# Altium PCB 抢答器.PcbDoc
Units mm, origin at the board's own origin, x right, y up, seen from the top; angles counter-clockwise.
Board outline 95.2 x 95.2 mm, 2 copper layers (Top Layer, Bottom Layer); 75 components, 1 nets, 234 pads, 14 vias.
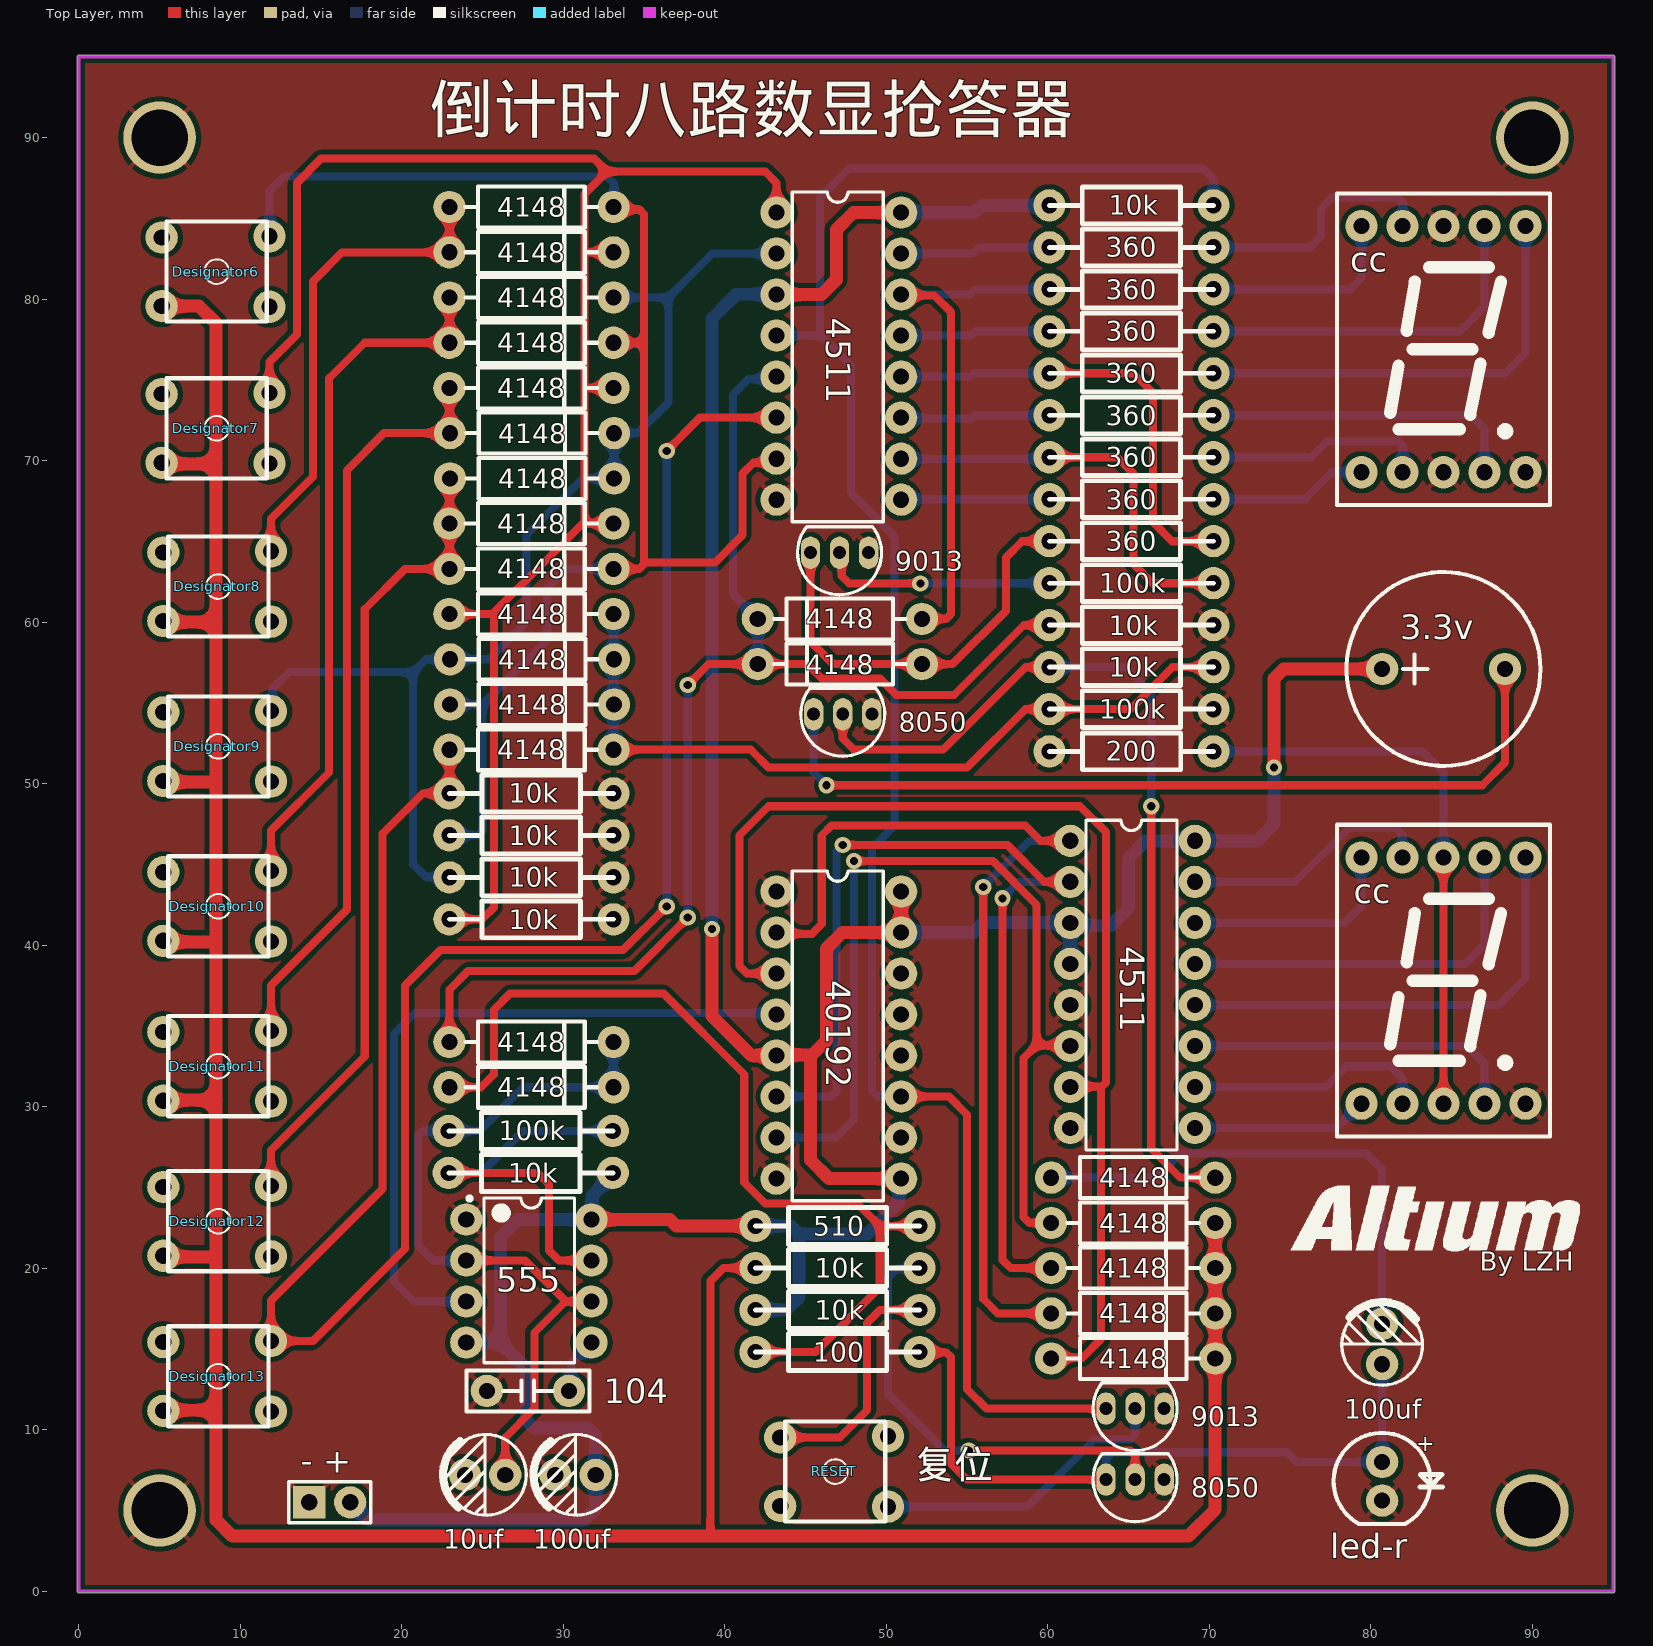
[diagram p0: Top Layer view]
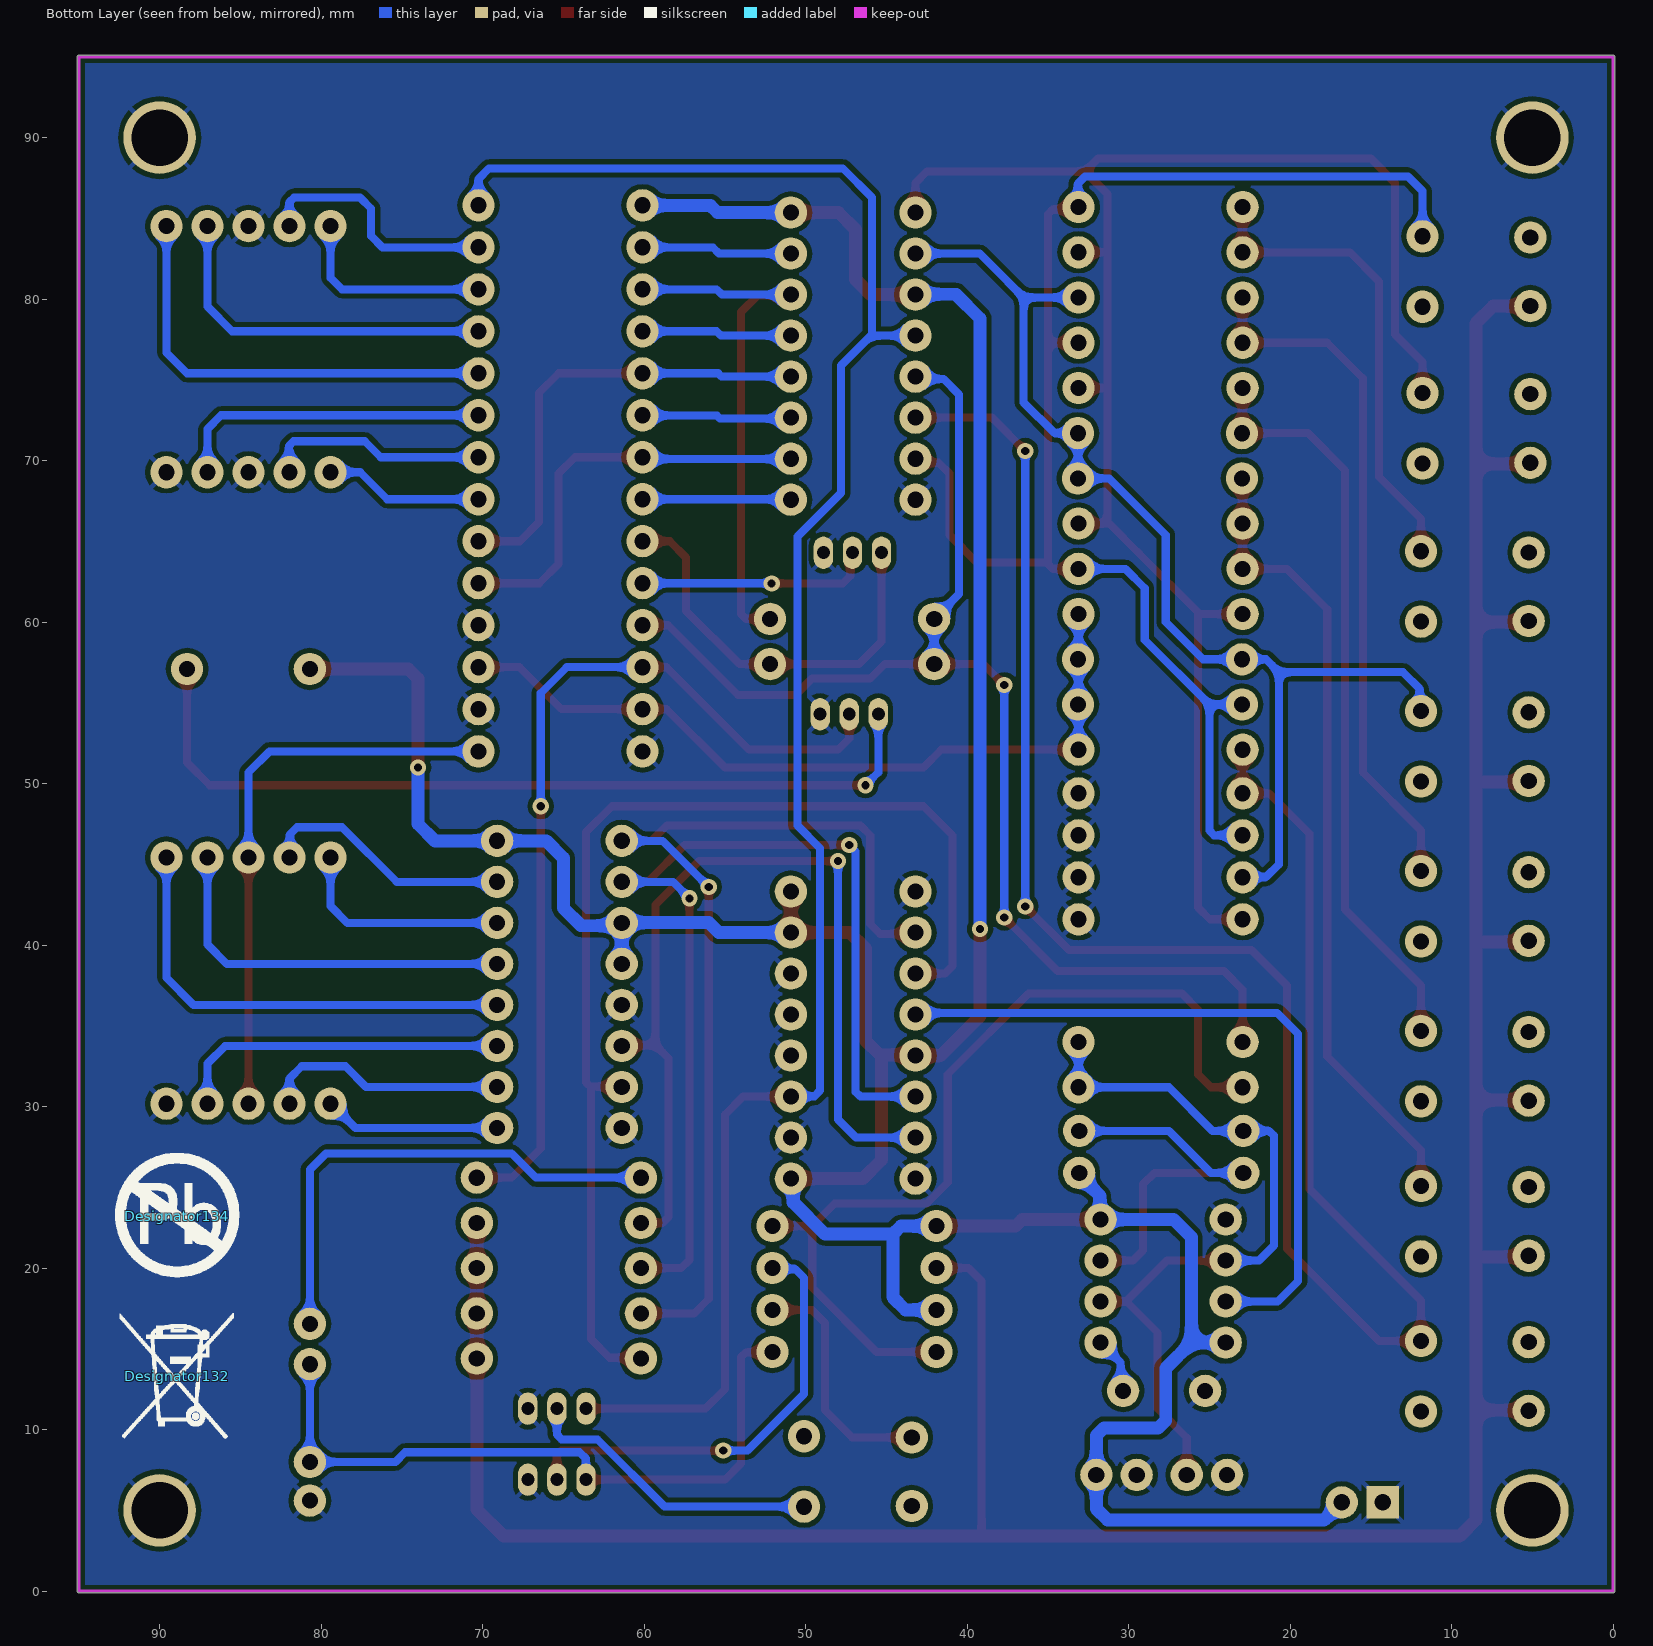
[diagram p1: Bottom Layer view, seen from below]
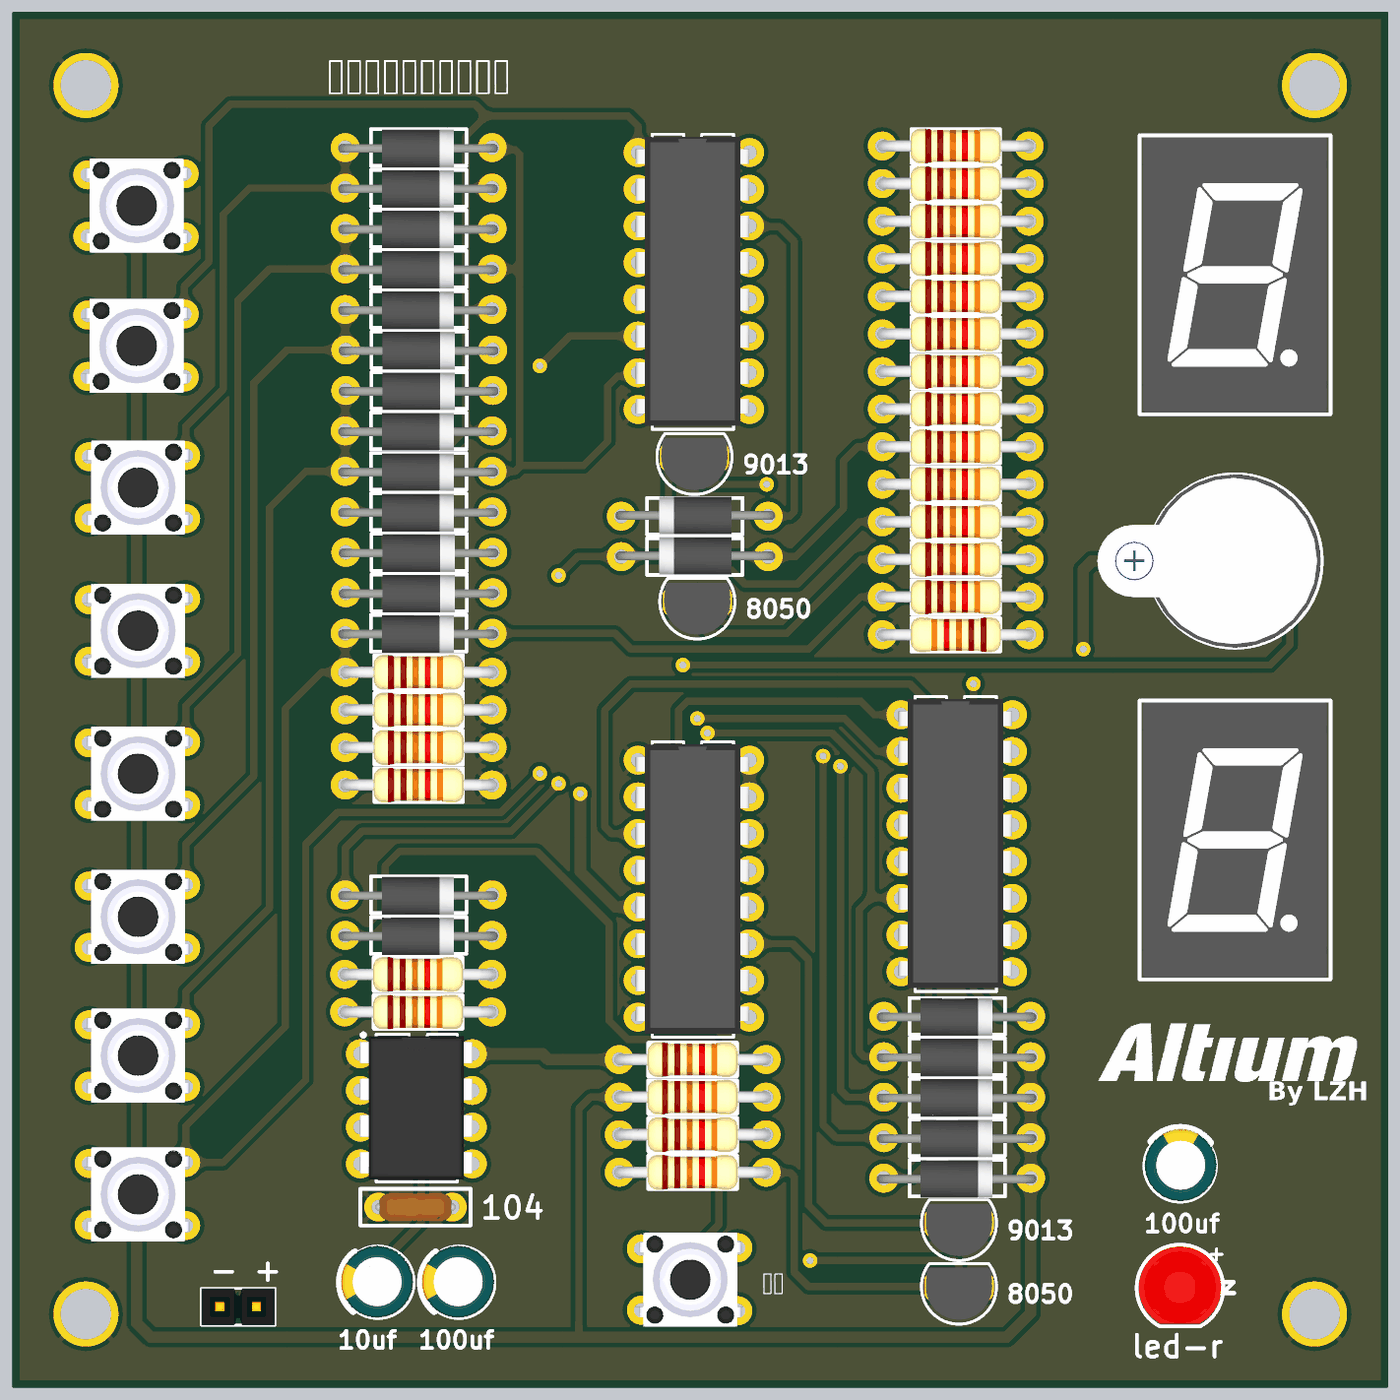
[diagram p2: 3D render of the assembled board from above, using the file's embedded part models]

## Layer stack, top to bottom
Top Solder: solder mask 0.0102, Solder Resist, Dk 3.5
Top Layer: signal copper 0.0356
Dielectric 1: dielectric 0.32, FR-4, Dk 4.8
Bottom Layer: signal copper 0.0356
Bottom Solder: solder mask 0.0102, Solder Resist, Dk 3.5

## Board outline
-0.1,0 ccw(c0,0) 0,-0.1 95,-0.1 ccw(c95,0) 95.1,0 95.1,95 ccw(c95,95) 95,95.1 0,95.1 ccw(c0,95) -0.1,95

## Design rules (kind name [scope] priority, off if disabled: settings)
Clearance Clearance_2 [OnLayer('Bottom Layer')] p1: gap=0.3 ignorepadtopadclearanceinfootprint=TRUE
Clearance Clearance_1 [OnLayer('Top Layer')] p2: gap=0.3 ignorepadtopadclearanceinfootprint=TRUE
ComponentClearance [All] p1: gap=0 collisioncheckmode=3 verticalgap=0 showdistances=FALSE
Height [All] p1: minheight=0 maxheight=40 prefheight=12.7
HoleSize [All] p1: absolutevalues=TRUE maxlimit=3.5 minlimit=0.025 maxpercent=80.000 minpercent=20.000
PlaneClearance [All] p1: clearance=0.3
PlaneConnect [All] p1: planeconnectstyle=Relief reliefexpansion=0.3 reliefentries=4 reliefconductorwidth=0.3 reliefairgap=0.3
PolygonConnect [All] p1: connectstyle=Relief reliefconductorwidth=0.3 reliefentries=4 polygonreliefangle="45 Angle" airgapwidth=0.3
RoutingVias [All] p1: holewidth=1 width=2 viastyle="Through Hole" minholewidth=0.5 minwidth=1 maxholewidth=0.6 maxwidth=8
SolderMaskExpansion [All] p1: expansion=0 istentingtop=FALSE
UnRoutedNet [All] p1: checkbadconnections=TRUE
Width [All] p1: maxlimit=0.8 minlimit=0.3 preferedwidth=0.5 minimp=50.000000 maximp=50.000000 favimp=50.000000
24 further rules are at their usual default settings.

## Components (designator, comment, footprint, x,y, rotation, side; value= is the part's Value field where it differs from the comment)
3.3v "Comment" FMQ7.6mm 80.7,57.1 r0 top
10k "Comment" AXIAL0.4 22.9,25.9 r0 top
10k "Comment" AXIAL0.4 41.896,20.009 r0 top
10k "Comment" AXIAL0.4 41.896,17.409 r0 top
10k "Comment" AXIAL0.4 60.096,59.809 r0 top
10k "Comment" AXIAL0.4 60.096,57.209 r0 top
10k "Comment" AXIAL0.4 60.096,85.809 r0 top
10k "Comment" AXIAL0.4 22.94,41.6 r0 top
10k "Comment" AXIAL0.4 22.94,44.2 r0 top
10k "Comment" AXIAL0.4 22.94,46.8 r0 top
10k "Comment" AXIAL0.4 22.94,49.4 r0 top
10uf "Comment" "CAP 2.5*5*11 - GD" 25.15,7.2 r180 top
100 "Comment" AXIAL0.4 41.896,14.809 r0 top
100k "Comment" AXIAL0.4 22.9,28.5 r0 top
100k "Comment" AXIAL0.4 60.096,54.609 r0 top
100k "Comment" AXIAL0.4 60.096,62.409 r0 top
100uf "Comment" "CAP 2.5*5*11 - GD" 80.7,15.3 r90 top
100uf "Comment" "CAP 2.5*5*11 - GD" 30.75,7.2 r180 top
104 "Comment" MLCC5.08-A 27.8,12.4 r0 top
200 "Comment" AXIAL0.4 70.26,52 r180 top
360 "Comment" AXIAL0.4 60.096,65.009 r0 top
360 "Comment" AXIAL0.4 60.096,75.409 r0 top
360 "Comment" AXIAL0.4 60.096,72.809 r0 top
360 "Comment" AXIAL0.4 60.096,70.209 r0 top
360 "Comment" AXIAL0.4 60.096,67.609 r0 top
360 "Comment" AXIAL0.4 60.096,83.209 r0 top
360 "Comment" AXIAL0.4 60.096,80.609 r0 top
360 "Comment" AXIAL0.4 60.096,78.009 r0 top
510 "Comment" AXIAL0.4 41.896,22.609 r0 top
555 "Comment" DIP8 28,19.2 r0 top
4148 "Comment" DIODE0.4 60.2,25.6 r0 top
4148 "Comment" DIODE0.4 60.2,14.4 r0 top
4148 "Comment" DIODE0.4 60.2,17.2 r0 top
4148 "Comment" DIODE0.4 60.2,20 r0 top
4148 "Comment" DIODE0.4 60.2,22.8 r0 top
4148 "Comment" DIODE0.4 22.94,34 r0 top
4148 "Comment" DIODE0.4 22.94,31.2 r0 top
4148 "Comment" DIODE0.4 52.2,57.4 r180 top
4148 "Comment" DIODE0.4 52.2,60.2 r180 top
4148 "Comment" DIODE0.4 22.94,85.7 r0 top
4148 "Comment" DIODE0.4 22.94,82.9 r0 top
4148 "Comment" DIODE0.4 22.94,52.1 r0 top
4148 "Comment" DIODE0.4 22.98,68.9 r0 top
4148 "Comment" DIODE0.4 22.98,71.7 r0 top
4148 "Comment" DIODE0.4 22.94,74.5 r0 top
4148 "Comment" DIODE0.4 22.94,77.3 r0 top
4148 "Comment" DIODE0.4 22.94,80.1 r0 top
4148 "Comment" DIODE0.4 22.94,66.1 r0 top
4148 "Comment" DIODE0.4 22.94,63.3 r0 top
4148 "Comment" DIODE0.4 22.94,60.5 r0 top
4148 "Comment" DIODE0.4 22.98,57.7 r0 top
4148 "Comment" DIODE0.4 22.98,54.9 r0 top
4511 "Comment" DIP16 59.667,46.46 r0 top
4511 "Comment" DIP16 41.481,85.36 r0 top
8050 "Comment" TO92A 47.3,54.3 r90 top
8050 "Comment" TO92A 65.4,6.9 r90 top
9013 "Comment" TO92A 65.4,11.3 r90 top
9013 "Comment" TO92A 47.1,64.3 r90 top
40192 "Comment" DIP16 41.481,43.32 r0 top
"- +" "Comment" HDR1X2 14.27,5.493 r0 top
"By LZH" "Comment" Altium_Logo 75.2,25.2 r0 top
cc "Comment" "SMG 0.5-1P" 84.5,76.9 r0 top
cc "Comment" "SMG 0.5-1P" 84.5,37.8 r0 top
Designator6 "Comment" KEY-DIP4 8.5,81.7 r0 top
Designator7 "Comment" KEY-DIP4 8.5,72 r0 top
Designator8 "Comment" KEY-DIP4 8.6,62.2 r0 top
Designator9 "Comment" KEY-DIP4 8.6,52.3 r0 top
Designator10 "Comment" KEY-DIP4 8.6,42.4 r0 top
Designator11 "Comment" KEY-DIP4 8.6,32.5 r0 top
Designator12 "Comment" KEY-DIP4 8.6,22.9 r0 top
Designator13 "Comment" KEY-DIP4 8.6,13.3 r0 top
Designator132 "Comment" ICO3 88.898,13.3 r180 bottom
Designator134 "Comment" ICO2 88.9,23.2 r180 bottom
led-r "Comment" LED5MM-RED 80.7,6.8 r180 top
RESET "Comment" KEY-DIP4 46.8,7.4 r0 top

## Footprints (in the part's own frame and the unit in brackets; to place one, negate y for a bottom-side part, rotate by r counter-clockwise, add the part's x,y. Pads: shape width x height; smd on the part's side, far side on the other; paste and mask are expansions set on the pad)
Altium_Logo [mm]
  silkscreen extent -0.15,-4.13 17.73,-0.11
AXIAL0.4 [mm] "此模型引用\"王千会\"作品，特此声明"
  round 2 hole 1: 1(0,0) 2(10.16,0)
  silkscreen extent 0,-1.14 10.16,1.14, body extent -0.32,-1.2 10.48,1.2, height 2.58
"CAP 2.5*5*11 - GD" [mm] "脚距2.5mm直径5mm高度11mm"
  round 2 hole 1: 1(-1.25,0) 2(1.25,0)
  silkscreen extent -2.55,-2.5 2.6,2.5, body extent -2.5,-2.54 2.51,2.46, height 11.04
DIODE0.4 [mm]
  round 2 hole 1: A(0,0) K(10.16,0)
  silkscreen extent 1.02,-1.27 9.14,1.27, body extent -0.5,-1.36 10.56,1.24, height 1.49
DIP8 [mm]
  round 2 hole 1: 1(-4.013,3.81) 2(-4.013,1.27) 3(-4.013,-1.27) 4(-4.013,-3.81) 5(3.734,-3.81) 6(3.734,-1.27) 7(3.734,1.27) 8(3.734,3.81)
  silkscreen extent -3.93,-5.05 2.69,5.23, body extent -4.06,-4.88 3.76,5.03, height 4.57
DIP16 [mm]
  round 2 hole 1: 1(1.719,0) 2(1.719,-2.54) 3(1.719,-5.08) 4(1.719,-7.62) 5(1.719,-10.16) 6(1.719,-12.7) 7(1.719,-15.24) 8(1.719,-17.78) 9(9.433,-17.78) 10(9.433,-15.24) 11(9.433,-12.7) 12(9.433,-10.16) 13(9.433,-7.62) 14(9.433,-5.08) 15(9.433,-2.54) 16(9.433,0)
  silkscreen extent 2.69,-19.15 8.33,1.27, body extent 1.55,-18.92 9.42,1.08, height 5.08
FMQ7.6mm [mm]
  round 2 hole 1: 1(0,0) 2(7.6,0)
  silkscreen extent -2.2,-6 9.8,6, body extent -5.73,-6 9.73,6, height 9.65
HDR1X2 [mm]
  rect 2x2 hole 1: 1(-0.01,0.007)
  round 2 hole 1: 2(2.53,0.007)
  silkscreen extent -1.28,-1.26 3.8,1.28, body extent -1.28,-1.26 3.8,1.28, height 8.41
ICO2 [mm]
  silkscreen extent -3.84,-3.76 3.84,3.89
ICO3 [mm]
  silkscreen extent -3.58,-3.86 3.48,3.86
KEY-DIP4 [mm] "6X6"
  round 2 hole 1: 1(-3.373,2.116) 1(3.299,2.189) 2(-3.373,-2.134) 2(3.299,-2.172)
  silkscreen extent -3.06,-3.09 3.13,3.1, body extent -4.12,-3.27 4.14,3.23, height 4.3
LED5MM-RED [mm]
  round 2 hole 1 mask+0.03: 1(0,-1.2) 2(0,1.2)
  silkscreen extent -3.73,-3 3.01,2.65, body extent -2.85,-2.89 2.85,2.46, height 8.6
MLCC5.08-A [mm] "独石电容，脚距5.08mm"
  round 2 hole 1: 1(-2.54,0) 2(2.54,0)
  silkscreen extent -3.81,-1.27 3.81,1.27, body extent -2.79,-1 2.79,1, height 3.71
"SMG 0.5-1P" [mm] "12.7*19*8mm(长宽厚)"
  round 2 hole 1: 1(-5.08,-7.62) 2(-2.54,-7.62) 3(0,-7.62) 4(2.54,-7.62) 5(5.08,-7.62) 6(5.08,7.62) 7(2.54,7.62) 8(0,7.62) 9(-2.54,7.62) 10(-5.08,7.62)
  silkscreen extent -6.6,-9.65 6.6,9.65, body extent -6.35,-9.5 6.35,9.5, height 8
TO92A [mm] "92晶体管"
  oval 2x1.2 hole 0.8: 1(0,-1.8) 2(0,0) 3(0,1.8)
  silkscreen extent -2.6,-2.6 1.6,2.6, body extent -2.3,-2.3 1.3,2.3, height 7.6

## Free pads (board coordinates)
  round 4.5 hole 3.5: 1(5,90) 2(90,90) 3(90,5) 4(5,5)

## Via types
v1: diameter 1, hole 0.5, Top Layer to Bottom Layer, 14 vias

## Nets (pads, with @x,y where several pads share a name; then routed paths per layer and width w, separated by ;. In a path a pad name is that pad's centre, name@x,y a point inside that pad or via, vN(x,y) a via of type N, cw(c..) or ccw(c..) an arc to the next point about the centre after c; other vN are vias at no path point)
GND: 10k.2@33.1,41.6 10k.2@33.1,44.2 10k.2@33.1,46.8 10k.2@33.1,49.4 10k.2@70.256,59.809 10uf.2 100k.2@70.256,54.609 100uf.2@29.5,7.2 104.1 200.2 555.1 4511.5@61.386,36.3 4511.8 8050.1 9013.1 40192.1 40192.8 40192.10 40192.12 40192.13 40192.14 "- +.1" cc.3@84.5,69.28 cc.5 cc.8@84.5,84.52 led-r.2 pad.1 pad.2 pad.3 pad.4
pads on no net: 3.3v.1 3.3v.2 10k.1 10k.2@33.06,25.9 10k.2@52.056,17.409 10k.2@52.056,20.009 10k.2@70.256,57.209 10k.2@70.256,85.809 10uf.1 100.1 100.2 100k.1 100k.2@33.06,28.5 100k.2@70.256,62.409 100uf.1 100uf.2@80.7,16.55 104.2 200.1 360.1 360.2 510.1 510.2 555.2 555.3 555.4 555.5 555.6 555.7 555.8 4148.A 4148.K 4511.1 4511.2 4511.3 4511.4 4511.5@43.2,75.2 4511.6 4511.7 4511.9 4511.10 4511.11 4511.12 4511.13 4511.14 4511.15 4511.16 8050.2 8050.3 9013.2 9013.3 40192.2 40192.3 40192.4 40192.5 40192.6 40192.7 40192.9 40192.11 40192.15 40192.16 "- +.2" cc.1 cc.2 cc.3@84.5,30.18 cc.4 cc.6 cc.7 cc.8@84.5,45.42 cc.9 cc.10 Designator6.1 Designator6.2 Designator7.1 Designator7.2 Designator8.1 Designator8.2 Designator9.1 Designator9.2 Designator10.1 Designator10.2 Designator11.1 Designator11.2 Designator12.1 Designator12.2 Designator13.1 Designator13.2 led-r.1 RESET.1 RESET.2
copper on no net: | length 2367.7
  Top Layer w0.5: 11.799,74.189 11.799,76.099 13.5,77.8 13.5,87.2 15,88.7 31.9,88.7 32.7,87.9 ; 11.899,25.089 11.899,27.299 17.7,33.1 17.7,60.8 20.2,63.3 22.94,63.3 22.94,66.1 22.94,68.34 23.2,68.6 22.94,68.86 22.98,68.9 ; 11.899,34.689 11.899,37.499 16.6,42.2 16.6,69.4 18.9,71.7 22.98,71.7 22.94,71.74 22.94,74.5 ; 11.899,44.589 11.899,47.099 15.5,50.7 15.5,75.1 17.7,77.3 22.647,77.3 22.94,77.3 ; 11.899,64.389 11.899,66.399 14.5,69 14.5,81.1 16.3,82.9 22.647,82.9 22.94,83.193 22.94,85.7 ; 22.9,25.9 28.4,25.9 29.1,25.2 29.1,21.1 29.73,20.47 31.734,20.47 ; 22.94,31.2 24.9,31.2 25.7,32 25.7,36 26.7,37 36.2,37 41.2,32 41.2,25.3 42.5,24 48.2,24 49.591,22.609 ; 22.94,34 22.94,37.24 24.1,38.4 34.4,38.4 v1(37.7,41.7) ; 22.94,41.6 24.972,41.6 25.7,42.328 25.7,60.535 ; 22.94,52.1 22.94,49.4 21.3,49.4 18.8,46.9 18.8,24.9 11.899,17.999 11.899,15.489 14.489,15.489 20.2,21.2 20.2,37.5 22.4,39.7 33.7,39.7 v1(36.4,42.4) ; 22.94,60.5 25.6,60.5 29.4,64.3 31.2,66.1 33.1,66.1 ; 22.94,77.593 22.94,80.1 ; 23.987,20.47 27.63,20.47 30.17,17.93 31.734,17.93 ; 26.4,7.2 26.4,7.606 26.4,9.5 28.2,11.3 28.2,16 30.15,17.95 ; 31.3,66.1 31.3,74.5 31.3,82.9 31.3,86.5 32.7,87.9 ; 31.322,74.5 33.1,74.5 ; 31.322,82.9 33.1,82.9 ; 33.1,52.1 41.6,52.1 42.7,51 55,51 58.609,54.609 60.096,54.609 65.109,54.609 67.709,57.209 70.256,57.209 ; 33.1,63.3 34.7,63.3 35,63.6 ; 33.1,77.3 35,77.3 ; 33.1,85.7 33.25,85.55 34.707,85.55 35,85.257 35,77.3 ; v1(36.4,70.6) 38.46,72.66 43.2,72.66 ; v1(37.7,56.1) 39,57.4 42.04,57.4 45.1,57.4 46,56.5 49.6,56.5 50.6,55.5 54.2,55.5 58.509,59.809 60.096,59.809 ; 39.1,3.4 39.1,19.2 39.909,20.009 41.896,20.009 ; 41.896,14.809 45.609,14.809 49.591,18.791 49.591,22.609 ; 43.2,38.24 41.36,38.24 40.9,38.7 40.9,46.8 42.7,48.6 62,48.6 63.6,47 63.6,31.5 63.3,31.2 63.3,15.6 62.15,14.45 60.25,14.45 60.2,14.4 ; 43.2,40.78 43.28,40.7 45.4,40.7 46,41.3 46,46.8 46.6,47.4 58.6,47.4 59.54,46.46 61.386,46.46 ; 43.2,70.12 42.953,69.873 41.773,69.873 41.1,69.2 41.1,65.4 39.4,63.7 35.1,63.7 35,63.6 ; 43.2,85.36 43.2,87.2 42.5,87.9 32.7,87.9 ; 43.427,9.516 47.116,9.516 48.8,11.2 48.8,16.6 49.609,17.409 52.056,17.409 ; 45.3,64.3 45.3,58.8 46.7,57.4 52.2,57.4 54.1,57.4 57.4,60.7 57.4,64 58.409,65.009 60.096,65.009 ; v1(46.3,49.9) 86.9,49.9 88.3,51.3 88.3,57.1 ; 47.1,64.3 47.234,64.166 47.234,62.866 47.7,62.4 v1(52.1,62.4) ; v1@47.295,46.2 57.5,46.2 59.78,43.92 61.386,43.92 ; 47.3,54.3 47.3,52.8 48,52.1 53.5,52.1 58.609,57.209 60.096,57.209 ; v1(48,45.2) 56.6,45.2 59.307,42.493 59.307,33.8 ; 50.914,30.62 53.88,30.62 55,29.5 55,12.5 56.2,11.3 63.6,11.3 ; 50.914,80.28 50.958,80.236 52.964,80.236 54,79.2 54,62.5 54,60.5 53.7,60.2 52.2,60.2 ; 52.056,14.809 52.081,14.785 53.707,14.785 54,14.492 54,7.9 55,6.9 63.6,6.9 ; 52.056,22.609 49.591,22.609 ; v1(55.1,8.7) 65.107,8.7 65.4,8.407 65.4,6.9 ; v1(56,43.6) 56,18.1 56.9,17.2 60.2,17.2 ; v1(57.2,42.9) 57.2,20.5 57.7,20 60.2,20 ; 60.096,70.209 64.291,70.209 65.3,69.2 65.3,63.6 66.491,62.409 70.256,62.409 ; 60.096,75.409 65.291,75.409 66.5,74.2 66.5,66.2 67.691,65.009 70.256,65.009 ; 60.2,22.8 58.861,22.8 58.5,23.161 58.5,32.993 59.307,33.8 ; 61.386,31.22 61.406,31.24 63.3,31.24 ; 61.386,33.76 61.346,33.8 59.307,33.8 ; v1(66.4,48.6) 66.4,27.4 68.2,25.6 70.36,25.6 ; 84.5,30.18 84.5,45.42 ; 35,63.6 35,77.3
  Top Layer w0.8: 5.127,69.866 5.193,69.8 8.5,69.8 ; 5.127,79.566 7.434,79.566 8.5,78.5 8.5,69.8 ; 5.227,11.166 5.26,11.2 8.5,11.2 ; 5.227,20.766 5.293,20.7 8.4,20.7 ; 5.227,30.366 5.26,30.4 8.5,30.4 ; 5.227,40.266 5.293,40.2 8.4,40.2 ; 5.227,50.166 5.293,50.1 8.4,50.1 ; 5.227,60.066 5.26,60.1 5.36,60 8.5,60 ; 31.734,23.01 31.744,23 36.6,23 36.991,22.609 41.896,22.609 ; v1(39.2,41) 39.2,35.6 41.64,33.16 43.2,33.16 43.24,33.2 45.4,33.2 ; 41.896,17.409 42.106,17.2 ; 43.2,80.28 45.98,80.28 46.9,81.2 46.9,84.3 47.96,85.36 50.914,85.36 ; 50.914,25.54 46.46,25.54 45.3,26.7 45.3,33.1 45.4,33.2 ; 50.914,43.32 50.914,41.249 50.445,40.78 47.28,40.78 46.3,39.8 46.3,34.1 45.4,33.2 ; 70.36,22.8 70.36,20 70.36,17.2 70.36,14.4 70.36,5.06 68.7,3.4 9.5,3.4 8.5,4.4 8.5,11.2 ; v1(74,51) 74,56.5 74.6,57.1 80.7,57.1 ; 8.5,11.2 8.5,20.7 8.5,30.4 ; 8.5,30.4 8.5,40.2 8.5,50.1 8.5,60 ; 8.5,60 8.5,69.8
  Bottom Layer w0.5: 11.799,83.889 11.799,86.699 12.7,87.6 32.7,87.6 33.143,87.157 33.143,85.743 33.1,85.7 ; 11.899,54.489 11.982,54.572 11.982,55.882 13,56.9 20.7,56.9 ; 22.9,25.9 24.9,25.9 27.5,28.5 33.06,28.5 ; 22.94,44.2 22.923,44.217 21.483,44.217 20.7,45 20.7,56.9 ; 22.94,46.8 24.707,46.8 25,47.093 25,54.9 ; 22.98,54.9 25,54.9 ; 23.987,17.93 20.77,17.93 19.5,19.2 19.5,34.5 20.8,35.8 43.1,35.8 43.2,35.7 ; 23.987,20.47 21.93,20.47 21,21.4 21,27.1 21,28.2 21.3,28.5 22.9,28.5 24.8,28.5 27.5,31.2 33.1,31.2 33.1,34 ; 30.34,12.4 30.494,12.554 30.494,14.15 31.734,15.39 ; 33.1,52.1 33.1,60.5 ; 33.1,63.3 30.2,63.3 29,62.1 29,58.9 25,54.9 ; 33.1,80.1 36.5,80.1 ; v1(36.4,42.4) v1(36.4,70.6) ; v1(37.7,41.7) v1(37.7,56.1) ; 42.04,57.4 42.04,60.2 40.5,61.74 40.5,74.1 41.45,75.05 43.05,75.05 43.2,75.2 ; 43.2,28.08 43.28,28 43.36,28.08 46.88,28.08 48,29.2 v1(48,45.2) ; 43.2,30.62 46.607,30.62 46.9,30.913 46.9,45.8 v1(47.3,46.2) ; 43.2,77.74 45.96,77.74 ; 43.2,82.82 39.22,82.82 38.5,82.1 36.5,80.1 ; 45.5,54.3 45.5,50.7 v1(46.3,49.9) ; 45.85,77.85 47.8,75.9 47.8,68 50.5,65.3 50.5,62.409 50.5,47.4 49.1,46 49.1,31 49.46,30.64 50.894,30.64 50.914,30.62 ; 45.9,77.85 45.9,86.3 47.7,88.1 69.6,88.1 70.256,87.444 70.256,85.809 ; 50.099,5.228 58.728,5.228 62.9,9.4 65.107,9.4 65.4,9.693 65.4,11.3 ; 50.914,70.12 50.934,70.1 59.987,70.1 60.096,70.209 ; 50.914,72.66 50.974,72.6 55.3,72.6 55.5,72.8 60.087,72.8 60.096,72.809 ; 50.914,75.2 55.2,75.2 55.409,75.409 60.096,75.409 ; 50.914,77.74 55.24,77.74 55.509,78.009 60.096,78.009 ; 50.914,80.28 55.18,80.28 55.509,80.609 60.096,80.609 ; 50.914,82.82 55.359,82.82 55.748,83.209 60.096,83.209 ; 52.056,20.009 51.993,19.945 50.645,19.945 50.1,19.4 50.1,12.2 53.6,8.7 v1(55.1,8.7) ; v1(52.1,62.4) 52.109,62.409 60.096,62.409 59.987,62.3 ; v1(56,43.6) 58.86,46.46 61.386,46.46 ; v1(57.2,42.9) 58.22,43.92 61.386,43.92 ; 60.096,57.209 64.791,57.209 66.4,55.6 v1(66.4,48.6) ; 60.096,67.609 50.943,67.609 ; 60.2,25.6 66.7,25.6 68.2,27.1 79.7,27.1 80.7,26.1 80.7,16.55 ; 63.6,6.9 63.605,6.905 63.605,8.205 64,8.6 74.8,8.6 75.4,8 80.7,8 80.7,14 ; 69.1,28.68 77.88,28.68 79.38,30.18 79.42,30.18 ; 69.1,31.22 77.22,31.22 78.5,32.5 81.2,32.5 81.96,31.74 81.96,30.18 ; 69.1,33.76 85.94,33.76 87.04,32.66 87.04,30.18 ; 69.1,36.3 87.9,36.3 89.58,37.98 89.58,45.42 ; 69.1,38.84 85.84,38.84 87.04,40.04 87.04,45.42 ; 69.1,41.38 78.38,41.38 79.42,42.42 79.42,45.42 ; 69.1,43.92 75.32,43.92 78.7,47.3 81.5,47.3 81.933,46.867 81.933,45.447 81.96,45.42 ; 70.256,67.609 75.909,67.609 77.58,69.28 79.42,69.28 ; 70.256,70.209 70.466,70.209 76.309,70.209 77.3,71.2 81.707,71.2 82,70.907 82,69.32 81.96,69.28 ; 70.256,72.809 70.266,72.8 70.275,72.809 86.191,72.809 87.04,71.96 87.04,69.28 ; 70.256,75.409 88.309,75.409 89.58,76.68 89.58,84.52 ; 70.256,78.009 85.509,78.009 87.04,79.54 87.04,84.52 ; 70.256,80.609 78.709,80.609 79.42,81.32 79.42,84.52 ; 70.256,83.209 70.266,83.2 76.2,83.2 76.9,83.9 76.9,85.6 77.6,86.3 81.667,86.3 81.96,86.007 81.96,84.52 ; 70.26,52 83.2,52 84.5,50.7 84.5,45.62 84.6,45.52 84.5,45.42 ; 20.7,56.9 21.5,57.7 22.98,57.7 25.4,57.7 27.7,60 27.7,65.4 31.2,68.9 33.14,68.9 33.14,71.7 34.6,71.7 36.5,73.6 36.5,80.1 ; 50.943,67.609 50.914,67.58 50.943,67.609
  Bottom Layer w0.8: 16.8,5.5 17.9,4.4 31.3,4.4 32,5.1 32,7.2 32,9.631 31.531,10.1 28.169,10.1 27.7,10.569 27.7,13.8 26.11,15.39 ; 23.987,15.39 26.11,15.39 ; 33.06,25.9 33.06,25.76 31.778,24.478 31.778,23.054 31.734,23.01 27.21,23.01 26.11,21.91 26.11,15.39 ; v1(39.2,41) 39.2,78.8 40.7,80.3 43.18,80.3 43.2,80.28 ; 41.896,17.409 43.809,17.409 44.6,18.2 44.6,22.1 ; 41.896,22.609 41.906,22.6 41.909,22.604 44.096,22.604 44.6,22.1 ; 50.914,25.54 50.771,25.397 50.771,24.071 48.8,22.1 44.6,22.1 ; 50.914,40.78 55.38,40.78 56,41.4 61.366,41.4 61.386,41.38 ; 50.914,85.36 55.46,85.36 55.9,85.8 60.087,85.8 60.096,85.809 ; 61.386,38.84 61.386,40.731 61.855,41.2 63.9,41.2 65,42.3 65,45.4 66.06,46.46 69.1,46.46 72.96,46.46 74,47.5 v1(74,51)

## Polygon pours and split planes (outlines as drawn)
GND on Bottom Layer "GND_L02_P000" (solid, remove dead copper, pour order 0): 0,95 0,0 95,0 95,95
GND on Top Layer "GND_L01_P001" (solid, remove dead copper, pour order 1): 0,95 0,0 95,0 95,95

## Keep-outs
Keep-Out Layer:
  lines w0.2: 0,0 0,95 95,95 95,0 90,0 0,0

## Silkscreen, mask and mechanical layers (free items; w line width, h text height)
Top Overlay:
  text "倒计时八路数显抢答器" at 21.7,89.409 h5
  text "复位" at 51.803,6.392 h3

## Text inside footprints (layer, text, board x,y; h text height)
led-r: Top Overlay "+" at 83.968,9.523 h1 r180